# Altium PCB AirTone-MLL.PcbDoc
Units mm, origin at the board's own origin, x right, y up, seen from the top; angles counter-clockwise.
Board outline 33.13 x 51.18 mm, 2 copper layers (Top Layer, Bottom Layer); 97 components, 78 nets, 367 pads, 121 vias.
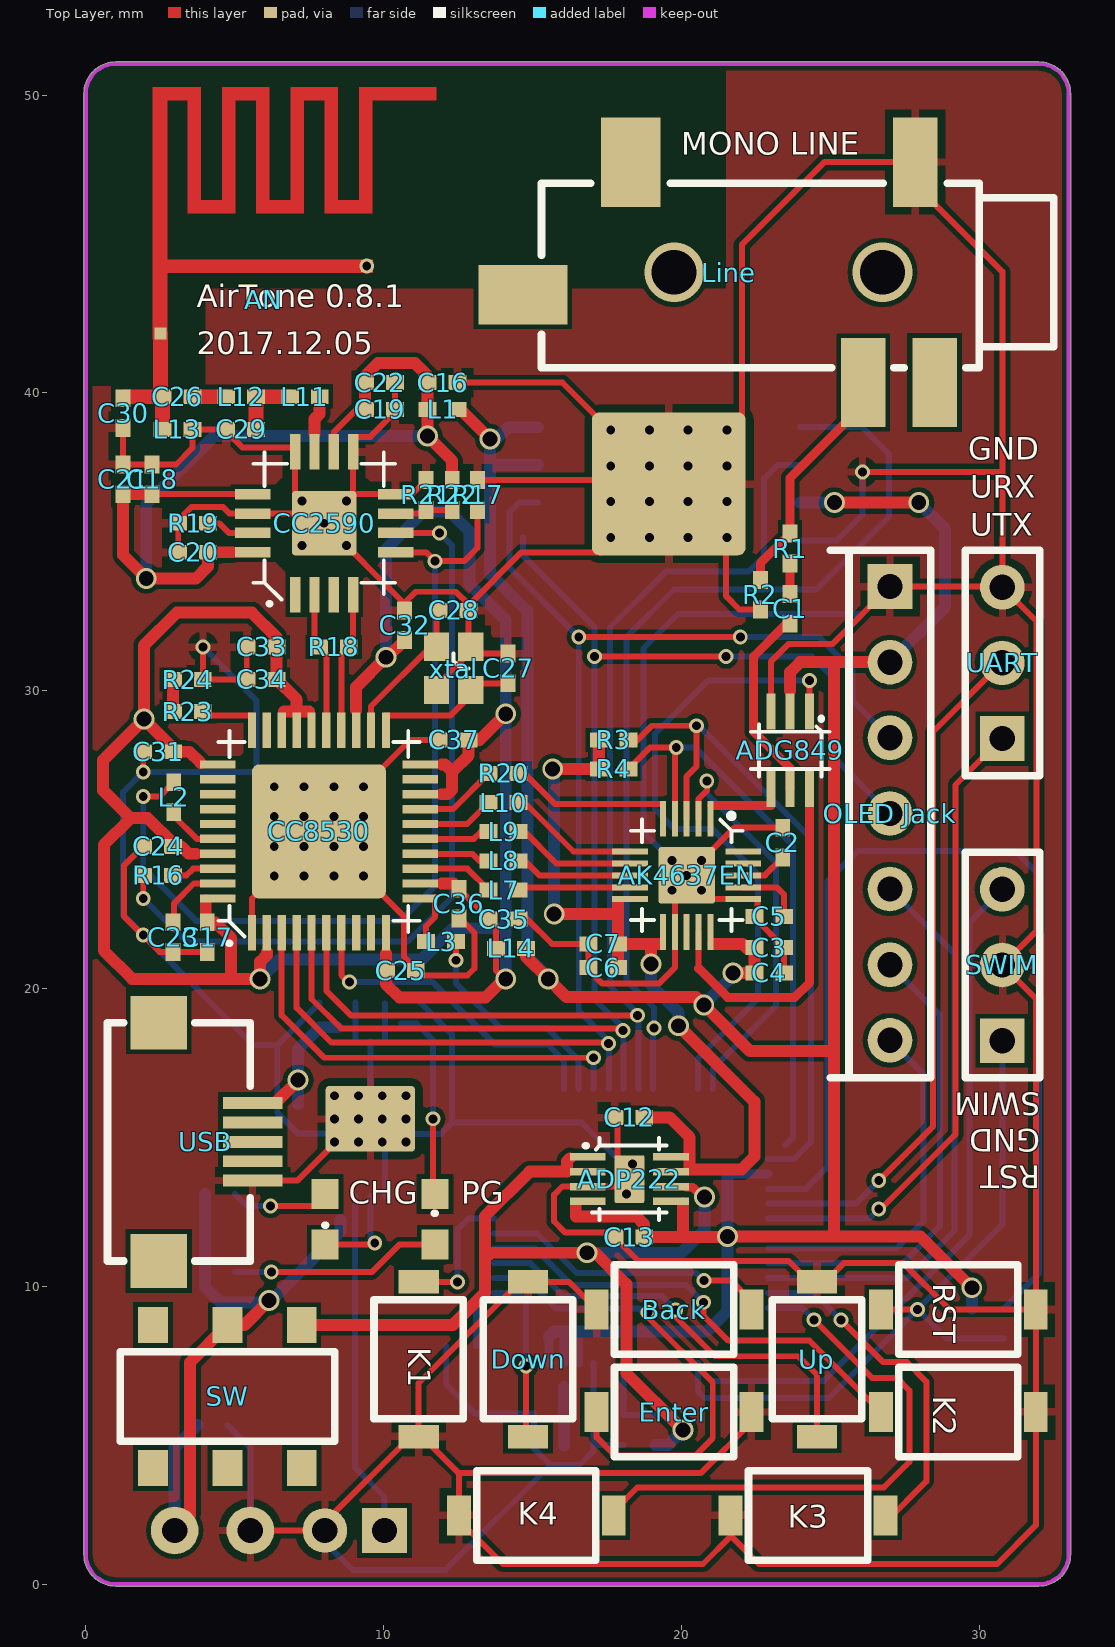
[diagram p0: Top Layer view]
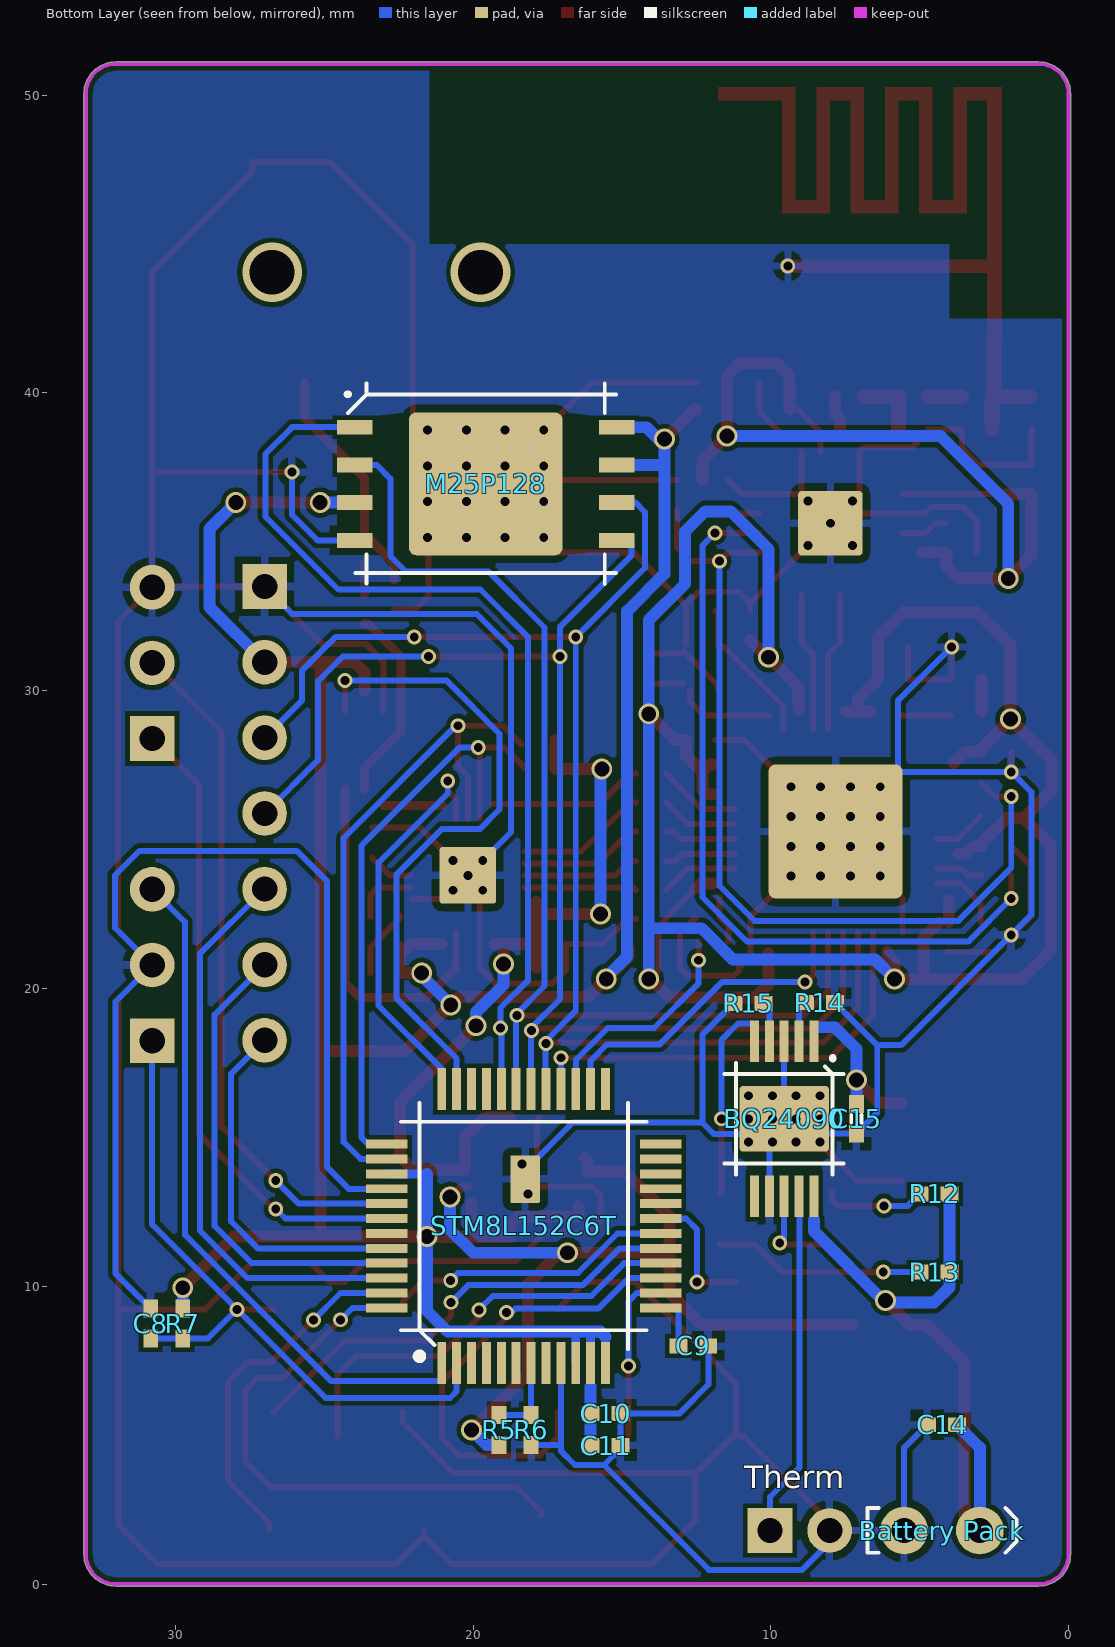
[diagram p1: Bottom Layer view, seen from below]

## Layer stack, top to bottom
Top Solder: solder mask 0.0102, Solder Resist, Dk 3.5
Top Layer: signal copper 0.0356
Dielectric 1: dielectric 0.32, FR-4, Dk 4.8
Bottom Layer: signal copper 0.0356
Bottom Solder: solder mask 0.0102, Solder Resist, Dk 3.5

## Board outline
-0.065,1 -0.065,50 cw(c0,50) -0.06,50.025 cw(c0,50.05) -0.065,50.05 cw(c1,50.05) 1,51.115 32,51.115 cw(c32,50.05) 33.065,50.05 cw(c33,50.05) 33.06,50.025 cw(c33,50) 33.065,50 33.065,1 cw(c32,1) 32,-0.065 1,-0.065 cw(c1,1)

## Design rules (kind name [scope] priority, off if disabled: settings)
Clearance [All] p1: gap=0.16
Clearance poly [InPoly] p2: gap=2
ComponentClearance [All] p1: gap=-1 collisioncheckmode=3 verticalgap=0.254 showdistances=FALSE
HoleToHoleClearance [All] p1: gap=0.01 allowstackedmicrovias=TRUE
MinimumSolderMaskSliver [All] p1: minsoldermaskwidth=0.01
PlaneClearance [All] p1: clearance=0.58
PolygonConnect [All] p1: connectstyle=Relief reliefconductorwidth=0.254 reliefentries=4 polygonreliefangle="90 Angle" airgapwidth=0.254
RoutingVias [All] p1: holewidth=0.3 width=0.4 viastyle="Through Hole" minholewidth=0.3 minwidth=0.4 maxholewidth=5 maxwidth=6
SilkToSilkClearance [All] p1: silktosilkclearance=0
SilkToSolderMaskClearance [IsPad] p1: minsilkscreentomaskgap=0 clearancetoexposedcopper=TRUE
SolderMaskExpansion [All] p1: expansion=0.102
Width [All] p1: maxlimit=0.8 minlimit=0.1 preferedwidth=0.2
24 further rules are at their usual default settings.

## Classes and differential pairs
component class RF: AN C16 C17 C18 C19 C20 C21 C22 C23 C24 C25 C26 C27 C28 C29 C30 C31 C32 C33 C34 C35 C36 C37 CC2590 CC8530 L1 L2 L3 L7 L8 L9 L10 L11 L12 L13 L14 R16 R17 R18 R19 R20 R21 R22 R23 R24 X1 xtal
component class MCU: ADP222 Back "Battery Pack" BQ24090 C8 C9 C10 C11 C12 C13 C14 C15 CHG Down Enter K1 K2 K3 K4 M25P128 "OLED Jack" PG R5 R6 R7 R12 R13 R14 R15 RST STM8L152C6T SW SWIM Therm UART Up USB
component class Audio: ADG849 AK4637EN C1 C2 C3 C4 C5 C6 C7 Line R1 R2 R3 R4

## Components (designator, comment, footprint, x,y, rotation, side; value= is the part's Value field where it differs from the comment)
ADG849 "ADG849" ADG849 23.65,28 r180 top
ADP222 "ADP222ACPZ-1833-R7" ADP22x 18.25,13.6 r270 top
AK4637EN "AK4637EN" AK4637EN 20.175,23.8 r180 top
AN "Antenna" ANT_WIGGLE_1MM 2.5,42 r0 top
Back "Button" Button_3x4 19.75,9.225 r180 top
"Battery Pack" "Battery Pack" "Battery Jack small" 4.25,1.8 r0 bottom
BQ24090 "BQ24090" BQ24090 9.55,15.625 r0 bottom
C1 "Capacity SMD" "SMD 0402" 23.65,32.75 r90 top
C2 "Capacity SMD" "SMD 0402" 23.4,24.9 r90 top
C3 "Capacity SMD" "SMD 0402" 22.95,21.375 r0 top
C4 "Capacity SMD" "SMD 0402" 22.95,20.525 r0 top
C5 "Capacity SMD" "SMD 0402" 22.95,22.425 r180 top
C6 "Capacity SMD" "SMD 0402" 17.375,20.7 r180 top
C7 "Capacity SMD" "SMD 0402" 17.375,21.5 r180 top
C8 "Capacity SMD" "SMD 0402" 30.825,8.75 r270 bottom
C9 "Capacity SMD" "SMD 0402" 12.6,8 r0 bottom
C10 "Capacity SMD" "SMD 0402" 15.55,5.725 r0 bottom
C11 "Capacity SMD" "SMD 0402" 15.55,4.65 r0 bottom
C12 "Capacity SMD" "SMD 0402" 18.25,15.675 r180 top
C13 "Capacity SMD" "SMD 0402" 18.25,11.65 r0 top
C14 "Capacity SMD" "SMD 0402" 4.25,5.35 r180 bottom
C15 "Capacity SMD" "SMD 0402_silk" 7.125,15.625 r90 bottom
C16 "Capacity SMD" "SMD 0402" 11.975,40.35 r180 top
C17 "Capacity SMD" "SMD 0402" 4.075,21.725 r270 top
C18 "Capacity SMD" "SMD 0402" 2.225,37.1 r270 top
C19 "Capacity SMD" "SMD 0402" 9.875,39.45 r180 top
C20 "Capacity SMD" "SMD 0402" 3.6,34.65 r0 top
C21 "Capacity SMD" "SMD 0402" 1.25,37.1 r270 top
C22 "Capacity SMD" "SMD 0402" 9.875,40.35 r180 top
C23 "Capacity SMD" "SMD 0402" 2.925,21.725 r270 top
C24 "Capacity SMD" "SMD 0402" 2.425,24.775 r0 top
C25 "Capacity SMD" "SMD 0402" 10.575,20.6 r180 top
C26 "Capacity SMD" "SMD 0402" 3.075,39.875 r180 top
C27 "Capacity SMD" "SMD 0402" 14.175,30.75 r270 top
C28 "Capacity SMD" "SMD 0402" 12.35,32.7 r180 top
C29 "Capacity SMD" "SMD 0402" 5.212,38.775 r0 top
C30 "Capacity SMD" "SMD 0402" 1.25,39.325 r90 top
C31 "Capacity SMD" "SMD 0402" 2.425,27.95 r0 top
C32 "Capacity SMD" "SMD 0402" 10.7,32.2 r270 top
C33 "Capacity SMD" "SMD 0402" 5.9,31.475 r0 top
C34 "Capacity SMD" "SMD 0402" 5.9,30.383 r0 top
C35 "Capacity SMD" "SMD 0402" 14.025,22.329 r180 top
C36 "Capacity SMD" "SMD 0402" 12.525,22.85 r90 top
C37 "Capacity SMD" "SMD 0402" 12.35,28.35 r0 top
CC2590 "CC2590" CC2590 8,35.625 r90 top
CC8530 "CC8530" CC8530 7.825,25.275 r90 top
CHG "LED" LED_0603 8.025,12.25 r270 top
Down "Button" Button_3x4 14.85,7.55 r90 top
Enter "Button" Button_3x4 19.75,5.775 r0 top
K1 "Button" Button_3x4 11.175,7.55 r270 top
K2 "Button" Button_3x4 29.3,5.775 r0 top
K3 "Button" Button_3x4 24.25,2.3 r180 top
K4 "Button" Button_3x4 15.125,2.3 r180 top
L1 "Inductor SMD" "SMD 0402" 11.975,39.45 r180 top
L2 "Inductor SMD" "SMD 0402" 2.95,26.425 r90 top
L3 "Inductor SMD" "SMD 0402" 11.925,21.575 r0 top
L7 "Inductor SMD" "SMD 0402" 14.025,23.308 r180 top
L8 "Inductor SMD" "SMD 0402" 14.025,24.287 r180 top
L9 "Inductor SMD" "SMD 0402" 14.025,25.267 r180 top
L10 "Inductor SMD" "SMD 0402" 14.025,26.246 r180 top
L11 "Inductor SMD" "SMD 0402" 7.35,39.875 r0 top
L12 "Inductor SMD" "SMD 0402" 5.212,39.875 r180 top
L13 "Inductor SMD" "SMD 0402" 3.075,38.775 r180 top
L14 "Inductor SMD" "SMD 0402" 14.275,21.35 r180 top
Line "Audio Jack" "Audio Jack PJ-328" 30,44.05 r180 top
M25P128 "M25P128" M25P128 19.575,36.95 r180 bottom
"OLED Jack" "OLED Jack" "OLED Jack" 27,33.5 r0 top
PG "LED" LED_0603 11.725,12.25 r90 top
R1 "Resistor SMD" "SMD 0402" 23.65,34.775 r90 top
R2 "Resistor SMD" "SMD 0402" 22.65,33.225 r90 top
R3 "Resistor SMD" "SMD 0402" 17.725,28.35 r180 top
R4 "Resistor SMD" "SMD 0402" 17.725,27.375 r180 top
R5 "Resistor SMD" "SMD 0402" 19.125,5.175 r270 bottom
R6 "Resistor SMD" "SMD 0402" 18.05,5.175 r90 bottom
R7 "Resistor SMD" "SMD 0402" 29.75,8.75 r90 bottom
R12 "Resistor SMD" "SMD 0402" 4.5,13.1 r180 bottom
R13 "Resistor SMD" "SMD 0402" 4.5,10.475 r180 bottom
R14 "Resistor SMD" "SMD 0402" 8.35,19.525 r0 bottom
R15 "Resistor SMD" "SMD 0402" 10.75,19.5 r180 bottom
R16 "Resistor SMD" "SMD 0402" 2.425,23.8 r180 top
R17 "Resistor SMD" "SMD 0402" 13.15,36.575 r270 top
R18 "Resistor SMD" "SMD 0402" 8.325,31.475 r180 top
R19 "Resistor SMD" "SMD 0402" 3.6,35.625 r180 top
R20 "Resistor SMD" "SMD 0402" 14.025,27.225 r180 top
R21 "Resistor SMD" "SMD 0402" 11.425,36.575 r270 top
R22 "Resistor SMD" "SMD 0402" 12.3,36.575 r270 top
R23 "Resistor SMD" "SMD 0402" 3.425,29.3 r0 top
R24 "Resistor SMD" "SMD 0402" 3.425,30.375 r180 top
RST "Button" Button_3x4 29.3,9.225 r180 top
STM8L152C6T "STM8L152C6T" "STM LQFP48" 18.3,12.025 r180 bottom (schematic designator STM1)
SW "Switch" "Switch 2P2T" 4.75,6.3 r0 top
SWIM "Header_3x1" HEADER_3x1_2.54 30.775,18.25 r90 top
Therm "Thermistor" Header_2x1_2.00 9.025,1.8 r180 bottom
UART "Header_3x1" HEADER_3x1_2.54 30.775,28.395 r90 top
Up "Button" Button_3x4 24.55,7.55 r90 top
USB "USB Jack Mirco-B" "USB Micro-B" 5.275,14.85 r270 top
xtal "XTAL" xtal_3225_FA-128 12.35,30.75 r90 top

## Footprints (in the part's own frame and the unit in brackets; to place one, negate y for a bottom-side part, rotate by r counter-clockwise, add the part's x,y. Pads: shape width x height; smd on the part's side, far side on the other; paste and mask are expansions set on the pad)
ADG849 [mm]
  rect 0.3x1.2 smd paste+0 mask+0: 1(-0.65,-1.3) 2(0,-1.3) 3(0.65,-1.3) 4(0.65,1.3) 5(0,1.3) 6(-0.65,1.3)
  silkscreen extent -1.33,-1.07 1.33,0.87
ADP22x [mm]
  rect 0.25x1.2 smd mask+0: 1(-0.75,-1.4) 2(-0.25,-1.4) 3(0.25,-1.4) 4(0.75,-1.4) 5(0.75,1.4) 6(0.25,1.4) 7(-0.25,1.4) 8(-0.75,1.4)
  rrect10% 1.6x1 smd mask+0: 3(0,0)
  rrect10% 1.6x1 smd far side mask+0: 3(0,0)
  silkscreen extent -1.38,-1.48 1.38,1.25
AK4637EN [mm]
  rect 0.2x1.2 smd mask+0: 1(-0.8,-1.9) 2(-0.4,-1.9) 3(0,-1.9) 4(0.4,-1.9) 5(0.8,-1.9) 11(0.8,1.9) 12(0.4,1.9) 13(0,1.9) 14(-0.4,1.9) 15(-0.8,1.9)
  rect 1.2x0.2 smd mask+0: 6(1.9,-0.8) 7(1.9,-0.4) 8(1.9,0) 9(1.9,0.4) 10(1.9,0.8) 16(-1.9,0.8) 17(-1.9,0.4) 18(-1.9,0) 19(-1.9,-0.4) 20(-1.9,-0.8)
  rrect10% 1.9x1.9 smd mask+0: 12(0,0)
  rrect10% 1.9x1.9 smd far side mask+0: 12(0,0)
  silkscreen extent -1.88,-2.05 1.88,1.88
ANT_WIGGLE_1MM [mm]
  rect 0.4x0.4 smd: 1(0,0) 2(6.93,2.26)
  Top Layer region: -0.262,-0.199 0.238,-0.199 0.238,8.274 -0.262,8.274
  Top Layer region: 0.017,2.026 7.147,2.026 7.147,2.475 0.017,2.475
  Top Layer region: -0.262,7.825 1.363,7.825 1.363,8.274 -0.262,8.274
  Top Layer region: 0.917,4.026 1.363,4.026 1.363,8.279 0.917,8.279
  Top Layer region: 0.917,4.026 2.517,4.026 2.517,4.476 0.917,4.476
  Top Layer region: 2.067,4.026 2.517,4.026 2.517,8.274 2.067,8.274
  Top Layer region: 2.067,7.824 3.668,7.824 3.668,8.274 2.067,8.274
  Top Layer region: 3.217,4.024 3.668,4.024 3.668,8.274 3.217,8.274
  Top Layer region: 3.217,4.024 4.818,4.024 4.818,4.475 3.217,4.475
  Top Layer region: 4.367,4.024 4.818,4.024 4.818,8.274 4.367,8.274
  Top Layer region: 4.367,7.824 5.969,7.824 5.969,8.277 4.367,8.277
  Top Layer region: 5.519,4.024 5.969,4.024 5.969,8.277 5.519,8.277
  Top Layer region: 5.519,4.024 7.117,4.024 7.117,4.475 5.519,4.475
  Top Layer region: 6.667,4.024 7.117,4.024 7.117,8.275 6.667,8.275
  Top Layer region: 6.667,7.826 9.267,7.826 9.267,8.275 6.667,8.275
"Audio Jack PJ-328" [mm]
  rect 1.5x3 smd mask+0.1: 1(2.15,-3.7) 3(3.9,3.7) 5(1.5,3.7)
  rect 2x3 smd mask+0.1: 2(11.7,-3.7)
  rect 3x2 smd mask+0.1: 4(15.325,0.75)
  silkscreen extent -2.5,-3 14.7,3.2
"Battery Jack small" [mm]
  round 1.6 hole 0.85 paste+0 mask+0: 1(-1.27,0) 2(1.27,0)
  silkscreen extent -2.5,-0.75 2.5,0.75
BQ24090 [mm]
  rect 0.3x1.4 smd paste+0 mask+0: 1(-1,-2.6) 2(-0.5,-2.6) 3(0,-2.6) 4(0.5,-2.6) 5(1,-2.6) 6(1,2.6) 7(0.5,2.6) 8(0,2.6) 9(-0.5,2.6) 10(-1,2.6)
  rrect10% 3x2.2 smd far side paste+0 mask+0: 3(0,0)
  rrect10% 3x2.2 smd paste+0 mask+0: 3(0,0)
  silkscreen extent -2,-2.05 2,1.88
Button_3x4 [mm]
  rect 0.8x1.35 smd paste+0 mask+0: 1(-2.6,0) 2(2.6,0)
  silkscreen extent -2,-1.5 2,1.5
CC2590 [mm]
  rect 1.2x0.35 smd paste+0 mask+0: 1(-2.4,0.975) 2(-2.4,0.325) 3(-2.4,-0.325) 4(-2.4,-0.975) 9(2.4,-0.975) 10(2.4,-0.325) 11(2.4,0.325) 12(2.4,0.975)
  rect 0.35x1.2 smd paste+0 mask+0: 5(-0.975,-2.4) 6(-0.325,-2.4) 7(0.325,-2.4) 8(0.975,-2.4) 13(0.975,2.4) 14(0.325,2.4) 15(-0.325,2.4) 16(-0.975,2.4)
  rrect10% 2.16x2.16 smd paste+0 mask+0: 17(0,0)
  rrect10% 2.16x2.16 smd far side paste+0 mask+0: 17(0,0)
  silkscreen extent -2.7,-2.37 2.37,2.37
CC8530 [mm]
  rect 1.2x0.28 smd paste+0 mask+0: 1(-3.4,2.25) 2(-3.4,1.75) 3(-3.4,1.25) 4(-3.4,0.75) 5(-3.4,0.25) 6(-3.4,-0.25) 7(-3.4,-0.75) 8(-3.4,-1.25) 9(-3.4,-1.75) 10(-3.4,-2.25) 21(3.4,-2.25) 22(3.4,-1.75) 23(3.4,-1.25) 24(3.4,-0.75) 25(3.4,-0.25) 26(3.4,0.25) 27(3.4,0.75) 28(3.4,1.25) 29(3.4,1.75) 30(3.4,2.25)
  rect 0.28x1.2 smd paste+0 mask+0: 11(-2.25,-3.4) 12(-1.75,-3.4) 13(-1.25,-3.4) 14(-0.75,-3.4) 15(-0.25,-3.4) 16(0.25,-3.4) 17(0.75,-3.4) 18(1.25,-3.4) 19(1.75,-3.4) 20(2.25,-3.4) 31(2.25,3.4) 32(1.75,3.4) 33(1.25,3.4) 34(0.75,3.4) 35(0.25,3.4) 36(-0.25,3.4) 37(-0.75,3.4) 38(-1.25,3.4) 39(-1.75,3.4) 40(-2.25,3.4)
  rrect10% 4.5x4.5 smd paste+0 mask+0: 41(0,0)
  rrect10% 4.5x4.5 smd far side paste+0 mask+0: 41(0,0)
  silkscreen extent -3.75,-3.37 3.37,3.37
Header_2x1_2.00 [mm]
  rect 1.5x1.5 hole 0.85 paste+0 mask+0: 1(-1,0)
  round 1.5 hole 0.85 paste+0 mask+0: 2(1,0)
HEADER_3x1_2.54 [mm]
  rect 1.5x1.5 hole 0.85 paste+0 mask+0: 1(0,0)
  round 1.5 hole 0.85 paste+0 mask+0: 2(2.54,0) 3(5.08,0)
  silkscreen extent -1.25,-1.25 6.33,1.25
LED_0603 [mm]
  rect 1x0.9 smd paste+0 mask+0: 1(-0.85,0)
  rect 1x0.9 smd mask+0: 2(0.85,0)
  silkscreen extent 0.2,0 0.2,0.03
M25P128 [mm]
  rect 1.2x0.5 smd paste+0 mask+0: 1(-4.4,1.9) 2(-4.4,0.633) 3(-4.4,-0.633) 4(-4.4,-1.9) 5(4.4,-1.9) 6(4.4,-0.633) 7(4.4,0.633) 8(4.4,1.9)
  rrect10% 5.16x4.8 smd far side paste+0 mask+0: 4(0,0)
  rrect10% 5.16x4.8 smd paste+0 mask+0: 4(0,0)
  silkscreen extent -4.65,-3.37 4.38,3.37
"OLED Jack" [mm]
  rect 1.5x1.5 hole 0.85 paste+0 mask+0: 1(0,0)
  round 1.5 hole 0.85 paste+0 mask+0: 2(0,-2.54) 3(0,-5.08) 4(0,-7.62) 5(0,-10.16) 6(0,-12.7) 7(0,-15.24)
  silkscreen extent -2,-16.5 1.38,1.22
"SMD 0402" [mm]
  rect 0.6x0.5 smd paste+0 mask+0: 1(-0.5,0) 2(0.5,0)
"SMD 0402_silk" [mm]
  rect 0.6x0.5 smd paste+0 mask+0: 1(-0.5,0) 2(0.5,0)
  silkscreen extent -0.13,-0.18 0.13,0.18
"STM LQFP48" [mm] "48-Pin LQFP"
  rect 0.3x1.4 smd paste+0 mask+0: 1(-2.75,-4.6) 2(-2.25,-4.6) 3(-1.75,-4.6) 4(-1.25,-4.6) 5(-0.75,-4.6) 6(-0.25,-4.6) 7(0.25,-4.6) 8(0.75,-4.6) 9(1.25,-4.6) 10(1.75,-4.6) 11(2.25,-4.6) 12(2.75,-4.6) 25(2.75,4.6) 26(2.25,4.6) 27(1.75,4.6) 28(1.25,4.6) 29(0.75,4.6) 30(0.25,4.6) 31(-0.25,4.6) 32(-0.75,4.6) 33(-1.25,4.6) 34(-1.75,4.6) 35(-2.25,4.6) 36(-2.75,4.6)
  rect 1.4x0.3 smd paste+0 mask+0: 13(4.6,-2.75) 14(4.6,-2.25) 15(4.6,-1.75) 16(4.6,-1.25) 17(4.6,-0.75) 18(4.6,-0.25) 19(4.6,0.25) 20(4.6,0.75) 21(4.6,1.25) 22(4.6,1.75) 23(4.6,2.25) 24(4.6,2.75) 37(-4.6,2.75) 38(-4.6,2.25) 39(-4.6,1.75) 40(-4.6,1.25) 41(-4.6,0.75) 42(-4.6,0.25) 43(-4.6,-0.25) 44(-4.6,-0.75) 45(-4.6,-1.25) 46(-4.6,-1.75) 47(-4.6,-2.25) 48(-4.6,-2.75)
  silkscreen extent -4.13,-4.47 4.13,4.13
"Switch 2P2T" [mm]
  rect 1x1.2 smd: 1(-2.5,2.4) 3(2.5,2.4) 4(-2.5,-2.4) 5(0,-2.4) 6(2.5,-2.4)
  rect 1x1.2 smd mask+0.1: 2(0,2.4)
  silkscreen extent -3.6,-1.5 3.6,1.5
"USB Micro-B" [mm]
  rect 1.8x1.9 smd paste+0 mask+0: 0(-4,-2.825) 0(4,-2.825)
  rect 0.4x2 smd paste+0 mask+0: 1(-1.3,0.325) 2(-0.65,0.325) 3(0,0.325) 4(0.65,0.325) 5(1.3,0.325)
  silkscreen extent -4,-4.55 4,0.25
xtal_3225_FA-128 [mm]
  rect 0.95x0.85 smd paste+0 mask+0: 1(-0.725,-0.575) 2(0.725,-0.575) 3(0.725,0.575) 4(-0.725,0.575)
  silkscreen extent 0,-0.5 0.5,0

## Part data
ADP222: library part ADP222
Line: library part "Audio Jack PJ-328"
Therm: library part "Thermistor NTC"
USB: library part "USB Jack Micro-B"

## Via types
v1: diameter 0.5, hole 0.3, Top Layer to Bottom Layer, 95 vias
v2: diameter 0.7, hole 0.5, Top Layer to Bottom Layer, 24 vias
v3: diameter 2, hole 1.5, Top Layer to Bottom Layer, 2 vias

## Nets (pads, with @x,y where several pads share a name; then routed paths per layer and width w, separated by ;. In a path a pad name is that pad's centre, name@x,y a point inside that pad or via, vN(x,y) a via of type N, cw(c..) or ccw(c..) an arc to the next point about the centre after c; other vN are vias at no path point)
8530_CSN: CC8530.3 STM8L152C6T.28 | length 15
  Top Layer w0.2: CC8530.3 6.575,19.1 8,17.675 v1(17.05,17.675)
  Bottom Layer w0.2: STM8L152C6T.28 v1@17.05,17.8
8530_MISO: CC8530.6 M25P128.2 STM8L152C6T.31 | length 38.8
  Top Layer w0.2: CC8530.6 8.075,19.925 8.899,19.101 v1(18.526,19.101)
  Bottom Layer w0.2: v1(18.526,19.101) 18.526,19.109 18.543,19.126 18.55,19.133 17.6,20.083 17.6,32.125 19.475,34 22.25,34 22.775,34.525 22.775,37.125 23.233,37.583 M25P128.2 ; STM8L152C6T.31 18.552,16.627 18.552,19.123 v1@18.55,19.125
8530_MOSI: "OLED Jack.4" CC8530.5 M25P128.5 STM8L152C6T.30 | length 46.8
  Top Layer w0.2: CC8530.5 7.575,19.65 8.565,18.66 17.973,18.66 v1(18.042,18.591) ; v1(17.075,31.15) v1(21.5,31.15)
  Bottom Layer w0.2: M25P128.5@14.675,35.15 14.675,34.55 17.075,32.15 17.075,19.65 18.042,18.683 v1(18.042,18.591) ; STM8L152C6T.30 18.06,16.635 18.06,18.665 v1@18.05,18.675 ; v1(21.5,31.15) 24.375,31.15 25.2,30.325 25.2,27.68 27,25.88
8530_RSTN: L3.2 STM8L152C6T.27 | length 7.6
  Top Layer w0.2: v1(12.425,20.95) L3.2
  Bottom Layer w0.2: v1(12.425,20.95) 12.425,20.175 13.925,18.675 15.475,18.675 16.54,17.61 16.54,16.635 STM8L152C6T.27
8530_SCLK: "OLED Jack.3" CC8530.4 M25P128.6 STM8L152C6T.29 | length 48
  Top Layer w0.2: CC8530.4 7.075,19.35 8.24,18.185 17.515,18.185 v1(17.55,18.15) v1@17.55,18.25 ; v1(16.55,31.8) v1(21.975,31.8)
  Bottom Layer w0.2: M25P128.6 14.542,36.317 14.225,36 14.225,34.125 v1(16.55,31.8) 16.55,19.25 17.55,18.25 v1@17.55,18.23 ; STM8L152C6T.29 17.56,16.635 17.56,18.24 v1@17.55,18.23 ; v1(17.55,18.15) v1@17.55,18.23 ; v1(21.975,31.8) 24.625,31.8 25.75,30.675 25.75,29.67 27,28.42
+1.8V: ADP222.7 ADP222.8 AK4637EN.10 AK4637EN.11 C6.1 C7.1 C12.1 R3.2 R4.2 | length 26.9
  Top Layer w0.4: v2(15.675,27.375) R4.2 R3.2 ; v2(15.725,22.5) 17.85,22.5 ; C6.1 C7.1 ; AK4637EN.10@17.875,22.9 C7.1 ; C12.1 19.6,15.675 20.275,15 20.275,13.925 22.025,13.925 22.45,14.35 22.45,16.2 v2(19.9,18.75) ; v2(18.976,20.826) 18.976,21.499 18.975,21.5 ; AK4637EN.11@19.275,21.5 18.975,21.5 ; C7.1 18.975,21.5
  Bottom Layer w0.4: v2(15.725,22.5) v2@15.725,27.375 ; v2(18.976,20.826) 18.976,20.126 18.975,20.125 19.9,19.2 v2(19.9,18.75)
+3.3V: "OLED Jack.2" ADG849.2 ADP222.4 ADP222.5 AK4637EN.15 C3.1 C4.1 C10.2 C11.2 C13.2 L1.1 L14.1 M25P128.3 M25P128.7 M25P128.8 R7.2 STM8L152C6T.10 STM8L152C6T.11 STM8L152C6T.12 STM8L152C6T.39 | length 107.7
  Top Layer w0.4: L1.1 12.575,39.45 v2(13.575,38.45) ; L14.1 14.775,21.075 v2(15.525,20.325) 16.135,19.715 20.485,19.715 v2(20.75,19.45) 22.3,17.9 25.125,17.9 ; 16.45,12.7 16.45,12.35 18.475,12.35 18.75,12.075 C13.2 20.05,11.65 ; ADP222.5@20.05,12.775 20.05,11.65 ; 21.075,21.5 22.05,21.5 C3.1@22.225,21.325 ; v2@21.525,11.65 20.05,11.65 ; v2(21.55,11.675) 28.025,11.675 v2(29.75,9.95) ; v2(21.725,20.525) C4.1 C3.1 ; 23.65,30 23.65,30.625 23.985,30.96 25.125,30.96 ; 25.125,11.7 25.125,30.96 ; v2(25.133,36.317) v2(27.967,36.317) ; 27,30.96 25.125,30.96
  Bottom Layer w0.3: STM8L152C6T.12 15.55,8.3 ; STM8L152C6T.11 16.05,8.475 ; STM8L152C6T.10 16.55,8.475 ; 21.55,13.775 STM8L152C6T.39
  Bottom Layer w0.4: 13.592,37.583 M25P128.7 ; M25P128.8 14.175,38.85 13.575,38.25 13.575,33.925 14.825,32.675 14.825,21.075 15.525,20.375 v2(15.525,20.325) ; 15.55,8.3 15.725,8.475 16.05,8.475 16.55,8.475 20.85,8.475 21.55,9.175 v2(21.55,11.675) 21.55,13.775 ; C11.2 16.05,6.625 ; v2(20.75,19.45) 21.725,20.425 v2(21.725,20.525) ; M25P128.3 v2(25.133,36.317) ; 27,30.96 28.85,32.81 28.85,35.433 v2(27.967,36.317) ; R7.2 v2(29.75,9.95)
AVDD_CC2590: C16.2 C18.2 C19.2 C20.2 C21.2 C22.2 CC2590.10 CC2590.13 CC2590.16 L1.2 R22.1 | length 32.6
  Top Layer w0.2: C18.2 CC2590.13 ; CC2590.10 8.325,38.675 C19.2@9.1,39.45
  Top Layer w0.4: C18.2 C21.2 1.25,34.55 v2(2.025,33.775) 3.7,33.775 4.1,34.175 C20.2 ; C20.2@4.35,34.65 4.925,34.65 ; C19.2 C22.2 ; C22.2@9.375,40.575 9.8,41 11.05,41 11.475,40.575 L1.2 v2(11.475,38.55) 12.3,37.725 R22.1
  Bottom Layer w0.4: v2(2.025,33.775) 2.025,36.275 4.3,38.55 v2(11.475,38.55)
GND: "Battery Pack.2" "OLED Jack.1" ADG849.3 ADP222.3 AK4637EN.12 AK4637EN.16 AN.2 Back.2 BQ24090.3 BQ24090.7 C2.2 C3.2 C4.2 C5.2 C6.2 C7.2 C8.1 C9.1 C10.1 C11.1 C12.2 C13.1 C14.1 C15.1 C16.1 C17.2 C18.1 C19.1 C20.1 C21.1 C22.1 C23.2 C24.1 C25.1 C27.1 C28.1 C29.1 C30.1 C31.1 C32.1 C33.1 C34.1 C35.1 C36.1 C37.1 CC2590.8 CC2590.9 CC2590.12 CC2590.14 CC2590.17 CC8530.1 CC8530.41 Down.2 Enter.2 K1.2 K2.2 K3.2 K4.2 L13.1 Line.1 M25P128.4 R2.1 R6.1 R14.1 R15.1 R17.1 R19.2 R21.1 R24.1 RST.1 STM8L152C6T.9 STM8L152C6T.40 SWIM.2 Therm.2 UART.3 Up.2 USB.5 xtal.2 xtal.4 | length 388.8
  Top Layer w0.2: C30.1 C21.1 C18.1 3.025,37.6 3.575,38.15 L13.1 C29.1 4.713,38.713 5.25,38.175 6.875,38.175 CC2590.12 CC2590.17@7.025,36.6 ; C24.1 1.275,24.125 1.275,22.425 2.475,21.225 C23.2 C17.2 ; v1(1.925,27.275) C31.1 ; C20.1 R19.2 3.1,35.725 3.55,36.175 4.6,36.175 4.825,35.95 CC2590.14 CC2590.17@7.675,35.95 ; v1(3.925,31.475) R24.1 5.392,30.375 C34.1 C33.1 ; 5.52,1.8 Therm.2 8.025,2.075 10.9,4.95 K1.2 ; CC8530.1 5.575,23.025 v1(6.325,23.775) v1(7.325,24.775) CC8530.41@7.825,25.275 ; USB.5 7.1,13.55 8.925,15.375 BQ24090.3@8.925,15.625 ; v1(8,35.625) 10.7,32.925 C32.1 10.7,32.95 11.075,33.325 12.425,33.325 12.85,32.9 C28.1@12.85,32.875 ; CC2590.9@8.9,38.525 9.55,38.525 10.375,39.35 C19.1 C22.1 ; CC2590.9 8.975,36.6 CC2590.8 10.95,36.6 R21.1 ; xtal.4 11.775,30.175 xtal.2@12.925,31.325 ; C37.1 10.9,28.35 CC8530.41@7.825,25.275 ; C16.1 16,40.35 M25P128.4@19.275,37.075 ; C36.1 12.568,22.35 13.05,21.868 13.05,20.675 12.815,20.44 11.235,20.44 C25.1 11.075,20.675 10.675,21.075 10.675,22.425 CC8530.41@7.825,25.275 ; xtal.2@12.85,31.55 C28.1 C28.1@12.85,32.875 ; xtal.2@13,31.25 C27.1 ; R17.1 M25P128.4@19.275,37.075 ; C35.1 14.821,22.329 15.65,21.5 C7.2 C6.2 16.875,20.625 17.325,20.175 19.25,20.175 19.775,20.7 19.775,21.9 AK4637EN.12@19.775,23.4 ; Back.2 16.225,10.15 Down.2 14.575,10.15 11.175,6.75 K1.2 ; M25P128.4@17.275,34.65 14.625,34.65 C28.1@12.85,32.875 ; C12.2 17.85,15.575 ADP222.3@17.85,14.325 ; ADP222.3@18,13.35 16.85,13.35 16,13.35 15.725,13.075 15.725,12.175 16.1,11.8 17.6,11.8 C13.1 18.55,10.85 23.6,10.85 24.3,10.15 Up.2 24.825,10.15 25.45,10.775 27.45,10.775 29,9.225 RST.1 ; M25P128.4@19.4,36.95 M25P128.4@19.275,37.075 ; M25P128.4@19.45,37.075 M25P128.4@19.275,37.075 ; v1(20.175,23.8) 21.775,25.4 C2.2 ; AK4637EN.12@20.975,23 AK4637EN.16 ; M25P128.4@21.5,35.15 21.5,33.175 21.95,32.725 R2.1 ; K3.2@21.65,1.8 21.65,1.625 ; M25P128.4@22.025,38.9 22.025,44.975 24.8,47.75 27.4,47.75 27.4,47.45 30.775,44.075 30.775,37.35 ; Enter.2 22.35,5.425 20.65,3.725 12.525,3.725 ; C5.2@22.45,22.375 C3.2 C4.2 ; C5.2 22.55,22.525 AK4637EN.16@22.55,23 ; ADG849.3 23,30.975 23.6,31.575 25.075,31.575 27,33.5 UART.3@30.75,33.5 ; v1(26.075,37.35) 30.775,37.35 ; K1.2 11.3,4.95 12.525,3.725 ; 12.525,3.725 K4.2 12.525,2.15 14,0.675 20.725,0.675 21.65,1.6 21.65,1.625 ; 21.65,1.625 22.6,0.675 30.6,0.675 31.9,1.975 K2.2 RST.1 ; 30.775,37.35 UART.3 31.925,32.325 31.925,21.94 SWIM.2 31.9,19.665 RST.1
  Bottom Layer w0.2: v1(3.925,31.475) 5.725,29.675 CC8530.41@5.725,27.375 ; C14.1 5.52,4.58 5.52,1.8 ; v1(6.325,26.775) 5.825,27.275 v1(1.925,27.275) 1.25,26.6 1.25,22.475 v1(1.925,21.8) 5.625,18.1 6.425,18.1 ; R14.1 6.425,18.1 ; Therm.2 8.025,1.4 8.95,0.475 12.075,0.475 15.6,4 ; BQ24090.3@9.05,15.125 C15.1 6.425,15.825 6.425,18.1 ; BQ24090.3@9.55,15.625 BQ24090.3@9.55,18.225 ; BQ24090.7 BQ24090.3@10.05,14.85 ; BQ24090.3@10.05,15.025 BQ24090.3@10.05,15.125 ; BQ24090.3@10.062,15.112 11.912,15.112 12.3,15.5 ; R15.1 12.3,18.45 12.3,15.5 ; C9.1 12.1,6.7 13.075,5.725 C10.1 C11.1 15.05,4.55 15.6,4 ; STM8L152C6T.9 17.05,4.475 16.575,4 15.6,4 ; 17.075,4.675 R6.1 ; ADP222.3@18.25,13.9 16.65,15.5 12.3,15.5 ; v1(19.675,24.3) 18.725,25.25 18.725,31.425 19.875,32.575 26.075,32.575 27,33.5 ; STM8L152C6T.40 24.175,13.275 24.9,14 24.9,23.6 25.925,24.625 31.2,24.625 32.025,23.8 32.025,22.04 SWIM.2 32,19.565 32,10.425 C8.1 ; M25P128.4@23.975,35.05 25.225,35.05 26.075,35.9 v1(26.075,37.35)
  other v1: 18.15,13.1 18.35,14.1 8.35,14.85 9.15,14.85 9.95,14.85 10.75,14.85 8.35,15.625 9.15,15.625 9.95,15.625 10.75,15.625 8.35,16.4 9.15,16.4 9.95,16.4 10.75,16.4 19.675,23.3 20.675,23.3 7.325,23.775 8.325,23.775 9.325,23.775 20.675,24.3 6.325,24.775 8.325,24.775 9.325,24.775 6.325,25.775 7.325,25.775 8.325,25.775 9.325,25.775 7.325,26.775 8.325,26.775 9.325,26.775 7.25,34.875 8.75,34.875 17.625,35.15 18.925,35.15 20.225,35.15 21.525,35.15 17.625,36.35 18.925,36.35 20.225,36.35 21.525,36.35 7.25,36.375 8.75,36.375 17.625,37.55 18.925,37.55 20.225,37.55 21.525,37.55 17.625,38.75 18.925,38.75 20.225,38.75 21.525,38.75 9.43,44.26
IOVDD: C17.1 C24.2 C25.2 C31.2 C32.2 C33.2 C34.2 C35.2 C36.2 C37.2 CC8530.2 CC8530.10 CC8530.12 CC8530.18 CC8530.20 CC8530.23 CC8530.26 CC8530.27 CC8530.28 CC8530.31 CC8530.37 CC8530.40 L14.2 | length 84.1
  Top Layer w0.2: C36.2 C35.2@13.525,22.35 ; C35.2 13.775,22.079 L14.2 13.775,20.6 v2@14.05,20.325
  Top Layer w0.4: C31.2 2.925,28.075 v2(1.95,29.05) ; C31.2@2.95,27.95 3.475,27.95 CC8530.31@3.85,27.575 ; 3.7,24.525 3.45,24.525 3.2,24.775 C24.2 2.925,24.875 2.075,25.725 1.5,25.725 ; C17.1@4.025,22.225 CC8530.40@4.025,22.95 ; 4.35,22.225 4.875,21.7 4.875,20.325 ; 6.075,21.225 6.075,21.126 5.85,20.901 v2(5.85,20.325) 4.875,20.325 ; 6.65,29.3 7.075,29.3 ; 7.5,29.3 7.075,29.3 ; 9.075,29.35 9.075,30.125 v2(10.075,31.125) 10.125,31.125 C32.2 ; 10.075,21.175 C25.2 10.075,20.15 10.525,19.7 13.425,19.7 v2@14.05,20.325 ; 11.925,26.525 12.15,26.525 12.3,26.675 12.3,27.275 ; 11.95,23.525 12.35,23.525 C36.2 ; 11.95,27.525 12.05,27.525 12.3,27.275 ; v2(14.1,29.225) 13.225,28.35 C37.2 12.85,27.825 12.3,27.275 ; 1.5,25.725 0.575,26.65 0.575,27.675 v2(1.95,29.05) ; 1.5,25.725 0.6,24.825 0.6,21.275 1.55,20.325 4.875,20.325 ; v2(1.95,29.05) 1.95,31.525 3.05,32.625 5.575,32.625 6.4,31.8 C33.2 C34.2 7.075,29.708 7.075,29.3
  Bottom Layer w0.4: v2(5.85,20.325) 6.5,20.975 11.275,20.975 12.325,22.025 14.075,22.025 ; v2(10.075,31.125) 10.075,34.75 11.35,36.025 12.2,36.025 12.875,35.35 12.875,33.6 14.1,32.375 v2(14.1,29.225) v2(14.1,20.325)
NetADG849_1: ADG849.1 STM8L152C6T.35 | length 21.9
  Top Layer w0.2: ADG849.1 v1(24.3,30.35)
  Bottom Layer w0.2: STM8L152C6T.35 20.55,17.65 22.575,19.675 22.575,23.825 21.05,25.35 19.775,25.35 19.115,26.01 19.115,28.565 20.9,30.35 v1(24.3,30.35)
NetADG849_4: ADG849.4 AK4637EN.1 | length 2
  Top Layer w0.3: AK4637EN.1@21.025,26.15 ADG849.4@23,26.15
NetADG849_5: ADG849.5 C1.1 | length 6.6
  Top Layer w0.3: ADG849.5 23.65,27.4 22.425,28.625 22.425,31.15 23.525,32.25 C1.1
NetADG849_6: ADG849.6 AK4637EN.14 | length 12.1
  Top Layer w0.2: 20.575,20.675 AK4637EN.14
  Top Layer w0.3: 20.575,20.675 21.55,19.7 23.8,19.7 24.3,20.2 ADG849.6
NetAK4637EN_2: AK4637EN.2 STM8L152C6T.36 | length 13.6
  Top Layer w0.2: AK4637EN.2 20.575,26.368 20.85,26.643 v1(20.85,26.975)
  Bottom Layer w0.2: v1(20.85,26.975) 20.85,26.55 23.175,24.225 23.175,19.425 21.05,17.3 STM8L152C6T.36
NetAK4637EN_3: AK4637EN.3 R3.1 STM8L152C6T.38 | length 22.9
  Top Layer w0.2: R3.1@18.375,28.2 19,28.825 v1(20.5,28.825) 20.5,27.45 20.175,27.125 AK4637EN.3
  Bottom Layer w0.2: v1(20.5,28.825) 20.575,28.825 24.35,25.05 24.35,14.85 23.775,14.275 STM8L152C6T.38
NetAK4637EN_4: AK4637EN.4 R4.1 STM8L152C6T.37 | length 19.7
  Top Layer w0.2: R4.1 18.95,28.1 v1(19.825,28.1) ; R4.1@18.225,27.512 R4.1@18.237,27.5 ; AK4637EN.4 v1@19.775,28.05
  Bottom Layer w0.2: v1(19.825,28.1) 20.446,28.1 23.75,24.796 23.75,15 STM8L152C6T.37@23.5,14.75
NetAK4637EN_5: AK4637EN.5 R20.1 | length 5.3
  Top Layer w0.2: R20.1 14.725,27.225 15.75,26.2 AK4637EN.5@19.375,26.2
NetAK4637EN_6: AK4637EN.6 L10.1 | length 4.4
  Top Layer w0.2: L10.1 14.729,26.246 16.375,24.6 AK4637EN.6
NetAK4637EN_7: AK4637EN.7 L9.1 | length 4.2
  Top Layer w0.2: L9.1 14.733,25.267 15.8,24.2 AK4637EN.7
NetAK4637EN_8: AK4637EN.8 L8.1 | length 4
  Top Layer w0.2: L8.1 14.737,24.287 15.225,23.8 AK4637EN.8
NetAK4637EN_9: AK4637EN.9 L7.1 | length 3.8
  Top Layer w0.2: L7.1 14.617,23.4 AK4637EN.9
NetAK4637EN_17: AK4637EN.17 C5.1 | length 2.2
  Top Layer w0.2: AK4637EN.17 23.2,23.4 23.45,23.15 C5.1
NetAK4637EN_18: AK4637EN.18 C2.1 | length 1.6
  Top Layer w0.2: AK4637EN.18 22.8,23.8 C2.1
NetAN_1: AN.1 C26.2 C30.2 L13.2 | length 4.4
  Top Layer w0.5: C30.2@1.3,39.875 C26.2 L13.2 ; C26.2@2.5,39.95 AN.1
"NetBattery Pack_1": "Battery Pack.1" BQ24090.10 C14.2 R12.2 R13.2 SW.2 | length 22.5
  Top Layer w0.4: 2.98,1.8 3.5,2.32 3.5,7.45 SW.2 5.325,8.7 v2(6.15,9.525)
  Bottom Layer w0.4: 2.98,1.8 2.98,4.58 C14.2 ; R12.2 R13.2 4,9.975 4.525,9.45 6.15,9.45 8.55,11.85 8.55,12.225
NetBQ24090_1: BQ24090.1 C15.2 USB.1 | length 5.3
  Top Layer w0.4: USB.1 6.35,16.15 v2(7.125,16.925)
  Bottom Layer w0.4: C15.2 v2(7.125,16.925) 7.125,17.975 7.85,18.7 BQ24090.1@8.45,18.7
NetBQ24090_2: BQ24090.2 R14.2 | length 1.3
  Bottom Layer w0.2: BQ24090.2 R14.2@9.05,19.525
NetBQ24090_4: BQ24090.4 R15.2 | length 1.3
  Bottom Layer w0.2: BQ24090.4 R15.2@10.05,19.5
NetBQ24090_5: BQ24090.5 PG.2 | length 6.5
  Top Layer w0.2: v1(11.65,15.625) 11.65,13.175 PG.2
  Bottom Layer w0.2: BQ24090.5@10.575,18.825 11.1,18.825 11.65,18.275 v1(11.65,15.625)
NetBQ24090_8: BQ24090.8 CHG.2 | length 3.3
  Top Layer w0.2: CHG.2 9.65,11.4 v1(9.7,11.45)
  Bottom Layer w0.2: BQ24090.8 9.55,11.6 v1(9.7,11.45)
NetBQ24090_9: BQ24090.9 Therm.1 | length 11.6
  Bottom Layer w0.2: BQ24090.9 9.04,13.015 9.04,3.91 10.025,2.925 Therm.1
NetC1_2: C1.2 R1.1 | length 1
  Top Layer w0.3: C1.2 R1.1
NetC9_2: C9.2 STM8L152C6T.13 | length 1.3
  Bottom Layer w0.2: C9.2 STM8L152C6T.13@13.1,9.3
NetC23_1: C23.1 CC8530.39 | length 2.4
  Top Layer w0.2: C23.1@2.95,22.225 2.95,22.85 3.625,23.525 CC8530.39
NetC26_1: C26.1 L12.2 | length 1.1
  Top Layer w0.5: C26.1 L12.2
NetC27_2: C27.2 CC8530.21 xtal.1 | length 4.5
  Top Layer w0.2: CC8530.21@10.05,29.175 12.25,29.175 12.725,29.65 xtal.1@12.725,30.025 ; xtal.1@12.95,30.25 C27.2
NetC28_2: C28.2 CC8530.22 xtal.3 | length 4.9
  Top Layer w0.2: CC8530.22 9.575,29.475 xtal.3@11.575,31.475 ; xtal.3 11.775,32.625 C28.2
NetC29_2: C29.2 L11.1 L12.1 | length 2.2
  Top Layer w0.5: C29.2 L12.1 L11.1
NetCC2590_2: CC2590.2 CC8530.25 R18.2 | length 4.7
  Top Layer w0.2: CC2590.2 7.675,31.625 8.075,31.225 CC8530.25
NetCC2590_4: CC2590.4 CC8530.24 R18.1 | length 4.7
  Top Layer w0.2: CC8530.24 8.575,31.225 8.975,31.625 CC2590.4
NetCC2590_5: CC2590.5 L2.2 R17.2 | length 29.9
  Top Layer w0.2: v1(1.925,26.45) 2.475,26.45 L2.2 ; CC2590.5 11.425,34.65 v1(11.725,34.35) 12.7,34.35 13.15,34.8 R17.2
  Bottom Layer w0.2: v1(1.925,26.45) 1.925,24.05 3.7,22.275 10.55,22.275 11.725,23.45 v1(11.725,34.35)
NetCC2590_6: CC2590.6 R16.2 | length 26.2
  Top Layer w0.2: v1(1.925,23.025) R16.2 ; CC2590.6 v1(11.875,35.3)
  Bottom Layer w0.2: v1(1.925,23.025) 3.375,21.575 10.8,21.575 12.3,23.075 12.3,34.875 v1(11.875,35.3)
NetCC2590_7: CC2590.7 R21.2 R22.2 | length 1.8
  Top Layer w0.2: CC2590.7 R21.2@11.3,35.95 ; R21.2 R22.2
NetCC2590_11: CC2590.11 L11.2 | length 1.3
  Top Layer w0.4: 7.675,38.625 7.675,39.125 7.85,39.3 L11.2
NetCC2590_15: CC2590.15 R19.1 | length 1.6
  Top Layer w0.2: R19.1 4.475,35.625 4.8,35.3 CC2590.15
NetCC8530_7: CC8530.7 STM8L152C6T.26 | length 11
  Top Layer w0.2: CC8530.7 8.575,20.45 8.8,20.225 v1(8.85,20.225)
  Bottom Layer w0.2: v1(8.85,20.225) 11.625,20.225 13.725,18.125 15.5,18.125 16.05,17.575 STM8L152C6T.26
NetCC8530_11: CC8530.11 L3.1 | length 1.6
  Top Layer w0.2: L3.1 11.425,22.1 11.721,22.396 CC8530.11@11.721,23.05
NetCC8530_13: CC8530.13 L7.2 | length 2.6
  Top Layer w0.2: CC8530.13 12.808,24.025 L7.2
NetCC8530_14: CC8530.14 L8.2 | length 2.4
  Top Layer w0.2: CC8530.14 12.975,24.525 13.213,24.287 L8.2
NetCC8530_15: CC8530.15 L9.2 | length 2.4
  Top Layer w0.2: CC8530.15 13.025,25.025 13.267,25.267 L9.2
NetCC8530_16: CC8530.16 L10.2 | length 2.6
  Top Layer w0.2: CC8530.16 12.8,25.525 13.521,26.246 L10.2
NetCC8530_17: CC8530.17 R20.2 | length 2.8
  Top Layer w0.2: CC8530.17 12.325,26.025 R20.2
NetCC8530_30: CC8530.30 R23.2 | length 1.7
  Top Layer w0.2: R23.2@3.925,29.175 CC8530.30@5.6,29.175
NetCC8530_36: CC8530.36 L2.1 | length 1.8
  Top Layer w0.2: L2.1@2.95,25.8 3.144,25.606 3.531,25.219 3.725,25.025 CC8530.36
NetCC8530_38: CC8530.38 R16.1 | length 1.6
  Top Layer w0.2: R16.1 3.375,23.8 3.6,24.025 CC8530.38
NetCHG_1: CHG.1 R12.1 | length 3.5
  Top Layer w0.2: v1(6.2,12.7) 7.725,12.7 7.95,12.925 CHG.1@7.95,13.175
  Bottom Layer w0.2: R12.1 5.4,12.7 v1(6.2,12.7)
NetLine_3: Line.3 R1.2 R2.2 | length 7.9
  Top Layer w0.3: R2.2 22.65,34.275 R1.2 23.65,37.15 25.65,39.15 Line.3@25.65,40.35
NetPG_1: PG.1 R13.1 | length 7.1
  Top Layer w0.2: v1(6.225,10.475) 9.6,10.475 10.525,11.4 PG.1
  Bottom Layer w0.2: R13.1 v1(6.225,10.475)
NetR5_1: R5.1 R6.2 STM8L152C6T.7 | length 2.8
  Bottom Layer w0.2: STM8L152C6T.7 R6.2 R5.1
NetR23_1: R23.1 R24.2 | length 1.1
  Top Layer w0.4: R23.1 R24.2
SPI_OLED_SCN: "OLED Jack.7" STM8L152C6T.44 | length 12.1
  Bottom Layer w0.2: STM8L152C6T.44 27.225,11.275 28.125,12.175 28.125,17.135 27,18.26
STM8_KEY_1: K1.1 STM8L152C6T.19 | length 4.4
  Top Layer w0.2: K1.1 v1(12.475,10.15)
  Bottom Layer w0.2: v1(12.475,10.15) 12.475,11.9 12.85,12.275 STM8L152C6T.19
STM8_KEY_2: K2.1 STM8L152C6T.17 | length 15.5
  Top Layer w0.2: v1(20.737,9.462) 20.737,9.013 21.575,8.175 24.3,8.175 K2.1
  Bottom Layer w0.2: STM8L152C6T.17 15.075,11.275 16.3,10.05 20.15,10.05 v1(20.737,9.462)
STM8_KEY_3: K3.1 STM8L152C6T.47 | length 12.1
  Top Layer w0.2: v1(25.362,8.862) 26.775,7.45 27.575,7.45 28.225,6.8 28.225,3.45 26.85,2.075 K3.1@26.85,1.8
  Bottom Layer w0.2: STM8L152C6T.47 24.45,9.775 v1(25.362,8.862)
STM8_KEY_4: K4.1 STM8L152C6T.48 | length 19.1
  Top Layer w0.2: K4.1 17.725,2.45 18.525,3.25 26.8,3.25 27.65,4.1 27.65,6.5 27.225,6.925 26.4,6.925 v1(24.45,8.875)
  Bottom Layer w0.2: STM8L152C6T.48 24.05,9.275 v1(24.45,8.875)
STM8_KEY_BACK: Back.1 STM8L152C6T.18 | length 9.9
  Top Layer w0.2: v1(20.75,10.2) 21.65,10.2 22.35,9.5 Back.1
  Bottom Layer w0.2: STM8L152C6T.18 15.15,11.775 16.475,10.45 20.5,10.45 v1(20.75,10.2)
STM8_KEY_DOWN: Down.1 STM8L152C6T.14 | length 5.7
  Top Layer w0.2: Down.1@14.775,5.025 v1(14.775,7.325)
  Bottom Layer w0.2: STM8L152C6T.14 14.5,9.775 14.775,9.5 v1(14.775,7.325)
STM8_KEY_ENTER: Enter.1 STM8L152C6T.15 | length 16
  Top Layer w0.2: Enter.1 17.15,4.925 17.75,4.325 20.475,4.325 21.05,4.9 21.05,6.775 18.875,8.95 v1(18.875,9.125)
  Bottom Layer w0.2: STM8L152C6T.15 14.775,10.275 15.8,9.25 18.575,9.25 18.7,9.125 v1(18.875,9.125)
STM8_KEY_UP: STM8L152C6T.16 Up.1 | length 14.6
  Top Layer w0.2: v1(19.806,9.206) 19.806,8.969 21.125,7.65 23.925,7.65 24.55,7.025 Up.1
  Bottom Layer w0.2: STM8L152C6T.16 14.925,10.775 16.025,9.675 19.337,9.675 v1(19.806,9.206)
STM8_M25P_SCN: M25P128.1 STM8L152C6T.32 | length 31.5
  Bottom Layer w0.2: STM8L152C6T.32 v1@19.05,18.675 ; v1(19.076,18.676) 19.076,19.349 18.15,20.275 18.15,31.8 19.75,33.4 24.525,33.4 26.975,35.85 26.975,37.95 26.075,38.85 M25P128.1
STM8_OLED_D/C: "OLED Jack.6" STM8L152C6T.45 | length 15.8
  Bottom Layer w0.2: STM8L152C6T.45 27.425,10.775 28.675,12.025 28.675,19.125 27,20.8
STM8_OLED_RST: "OLED Jack.5" STM8L152C6T.46 | length 19.3
  Bottom Layer w0.2: STM8L152C6T.46 27.575,10.275 29.175,11.875 29.175,21.165 27,23.34
STM8_RST: C8.2 R7.1 RST.2 STM8L152C6T.2 SWIM.1 | length 24.4
  Top Layer w0.2: RST.2 v1(27.925,9.225)
  Bottom Layer w0.2: STM8L152C6T.2 20.55,6.475 20.775,6.25 24.95,6.25 v1(27.925,9.225) ; SWIM.1 30.775,12.075 v1(27.925,9.225) ; C8.2 R7.1 28.9,8.25 v1(27.925,9.225)
STM8_SWIM: STM8L152C6T.1 SWIM.3 | length 22.7
  Bottom Layer w0.2: STM8L152C6T.1@21.025,6.825 24.775,6.825 29.675,11.725 29.675,22.23 SWIM.3
"SYSTEM LOAD": ADP222.1 ADP222.2 ADP222.6 R5.2 SW.3 | length 31
  Top Layer w0.3: ADP222.6@20.175,13.325 20.375,13.325 20.7,13 v2(20.775,13)
  Top Layer w0.4: SW.3 12.325,8.7 13.4,9.775 13.4,10.92 ; 13.4,10.975 13.4,12.35 14.9,13.85 16.15,13.85 16.15,14.2 16.25,14.3 ; 13.505,11.025 13.605,11.125 v2(16.825,11.125) 17.1,11.125 18.15,10.075 18.15,7.075 v2(20.05,5.175)
  Bottom Layer w0.4: v2(16.825,11.125) 20,11.125 20.775,11.9 v2(20.775,13) ; R5.2 19.55,4.675 v2(20.05,5.175)
USART_RX: STM8L152C6T.41 UART.2 | length 23.2
  Top Layer w0.2: v1(26.625,13.55) 28.45,15.375 28.45,28.63 UART.2@30.775,30.955
  Bottom Layer w0.2: STM8L152C6T.41 25.85,12.775 v1(26.625,13.55)
USART_TX: STM8L152C6T.42 UART.1 | length 21.4
  Top Layer w0.2: v1(26.625,12.6) 26.7,12.6 29.2,15.1 29.2,26.84 UART.1@30.775,28.415
  Bottom Layer w0.2: STM8L152C6T.42 26.3,12.275 v1(26.625,12.6)
pads on no net: AK4637EN.13 AK4637EN.19 AK4637EN.20 BQ24090.6 CC2590.1 CC2590.3 CC8530.8 CC8530.9 CC8530.19 CC8530.29 CC8530.32 CC8530.33 CC8530.34 CC8530.35 Line.2 Line.4 Line.5 STM8L152C6T.3 STM8L152C6T.4 STM8L152C6T.5 STM8L152C6T.6 STM8L152C6T.8 STM8L152C6T.20 STM8L152C6T.21 STM8L152C6T.22 STM8L152C6T.23 STM8L152C6T.24 STM8L152C6T.25 STM8L152C6T.33 STM8L152C6T.34 STM8L152C6T.43 SW.1 SW.4 SW.5 SW.6 USB.0 USB.2 USB.3 USB.4
copper on no net:
  other v3: 19.75,44.05 26.75,44.05

## Polygon pours and split planes (outlines as drawn)
GND on Bottom Layer "GND" (solid, pour order 16): 0,0 33,0 33,51 0,51
GND on Top Layer "GND" (solid, pour order 18): 0,0 33,0 33,51 -0.06,51

## Keep-outs
Keep-Out Layer:
  lines w0.13: 0,50 0,1 ccw(c1,1) 1,0 32,0 ccw(c32,1) 33,1 33,50 ; 0,50.05 cw(c1,50.05) 1,51.05 32,51.05 cw(c32,50.05) 33,50.05

## Other copper
Top Layer:
  pour cut-out: -0.06,43.5 -0.065,40.225 4.025,40.225 4.025,43.5 21.5,43.5 21.5,51 11.95,51 -0.06,51 -0.06,47
  pour cut-out: 19.275,22.5 18.875,22.9 18.875,24.7 19.275,25.1 21.075,25.1 21.475,24.7 21.475,22.9 21.075,22.5
  pour cut-out: 5.025,22.885 5.435,22.475 10.215,22.475 10.625,22.885 10.625,27.665 10.215,28.075 5.435,28.075 5.025,27.665
  pour cut-out: 17.45,12.725 17.45,14.475 17.75,14.4 18.75,14.4 19.05,14.475 19.05,12.725 18.75,12.8 17.75,12.8
  pour cut-out: 6.2,34.475 6.85,33.825 9.15,33.825 9.8,34.475 9.8,36.775 9.15,37.425 6.85,37.425 6.2,36.775
Bottom Layer:
  pour cut-out: 8.4,17.525 8.05,16.725 8.05,14.525 8.4,13.725 10.7,13.725 11.05,14.525 11.05,16.725 10.7,17.525
  pour cut-out: 14.575,34.8 16.995,34.55 22.155,34.55 24.575,34.8 24.575,39.1 22.155,39.35 16.995,39.35 14.575,39.1
  pour cut-out: -0.065,42.5 4,42.5 4,45 21.475,45 21.475,51 11.95,51 -0.065,51

## Silkscreen, mask and mechanical layers (free items; w line width, h text height)
Top Overlay:
  text "MONO LINE" at 20,48 h0.76
  text "AirTone 0.8.1" at 3.725,42.875 h0.76
  text "2017.12.05" at 3.725,41.3 h0.76
  text "GND" at 29.625,37.75 h0.76
  text "URX" at 29.7,36.475 h0.76
  text "UTX" at 29.7,35.208 h0.76
  text "SWIM" at 32.05,16.5 h0.76 r180
  text "GND" at 32.05,15.275 h0.76 r180
  text "RST" at 32.05,14.05 h0.76 r180